# EAGLE board Breakouts (EAGLE 6.4)
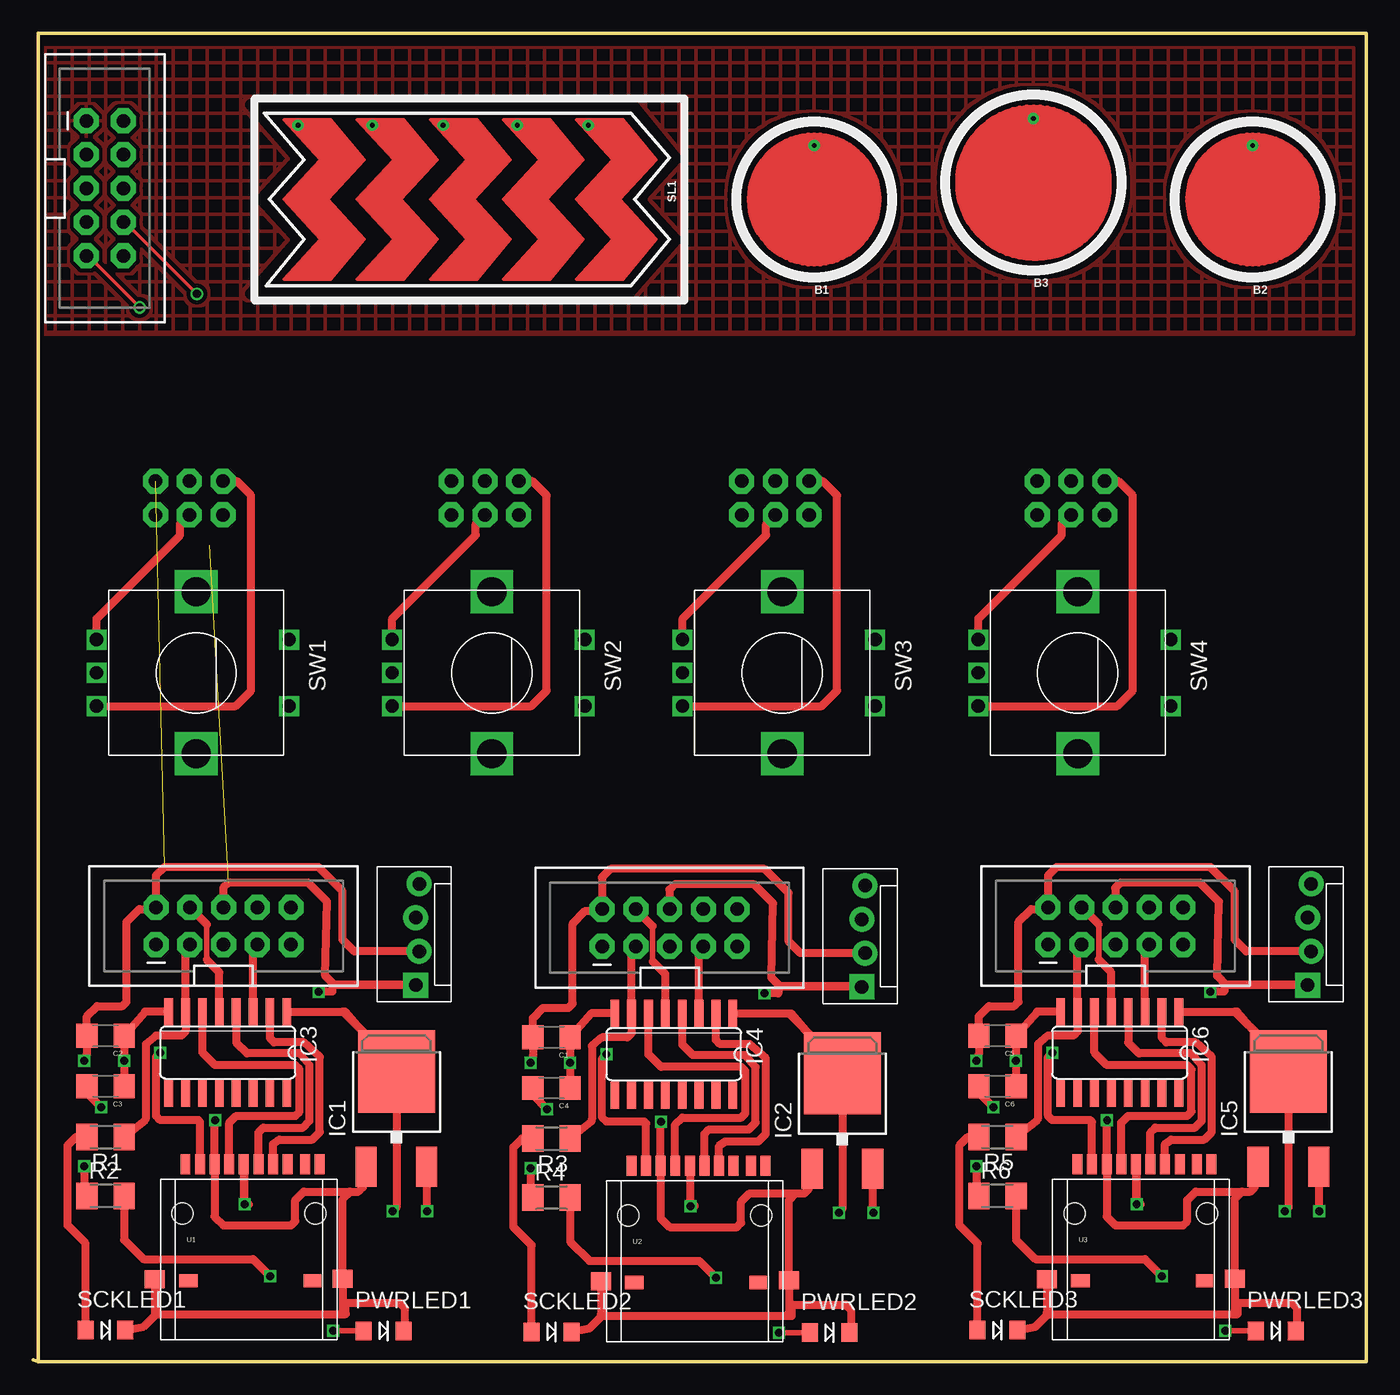
[diagram p0: board, top side]
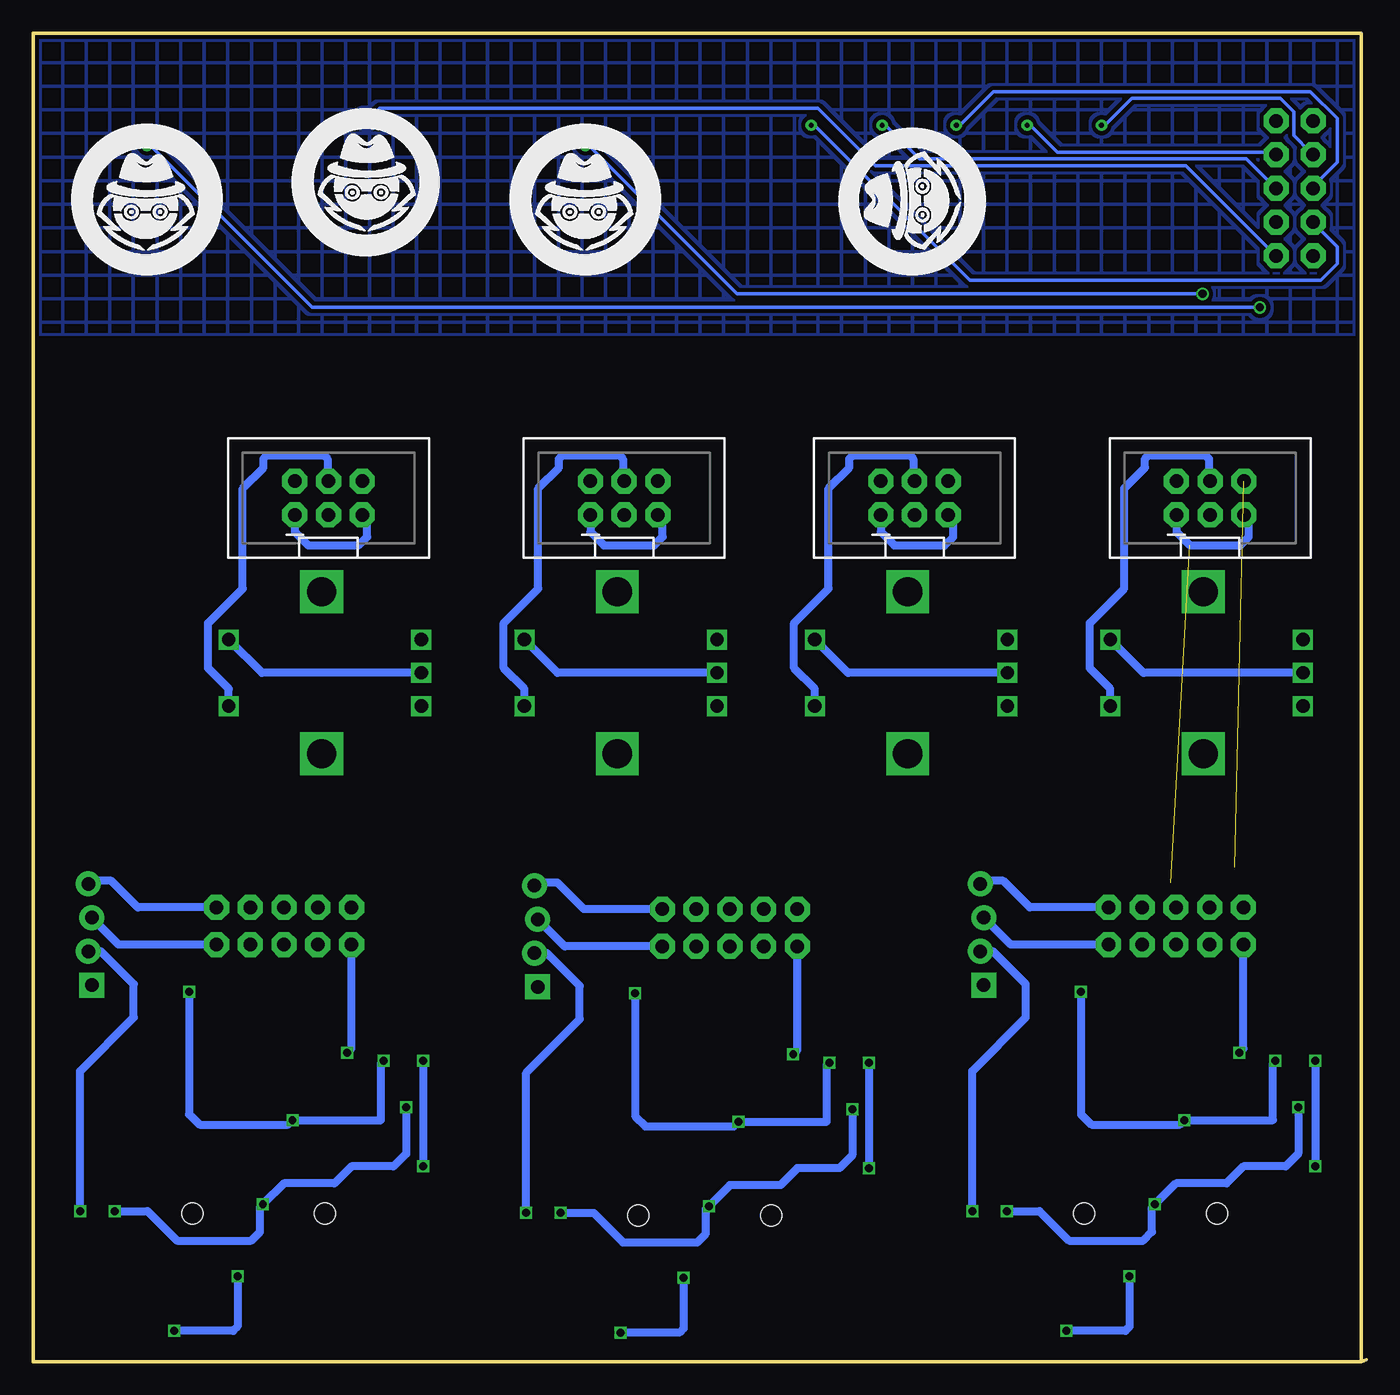
[diagram p1: board, bottom side, seen from below]

Size 100.39 x 100 mm. Coordinates in mm from the lower left corner, seen from the top.
Outline: 0,0.13 0.39,0
Outline: 0.39,0 100.39,0 100.39,100 0.39,100 0.39,0
Copper layers (1*16): Top 0.035mm / dielectric 1.5mm / Bottom 0.035mm
Design rules "dirt_cheap_dirty_boards.v1": minimum track width 5mil, minimum drill 12mil, track to track 5mil, track to pad 5mil, pad to pad 5mil, via to via 5mil, smd to smd 0mil, copper to edge 10mil, drill to drill 10mil, minimum pad ring 10mil, minimum via ring 6mil, stop-mask expansion 2mil, vias tented up to drill 25mil, thermal gap 10mil

## Footprints (pad centres in the part's own frame; a part is rotated, then mirrored left to right if it is on the bottom)
BUTTON_PASSIVE_10MM = drill 0.356: BUTTON 0,4.064
BUTTON_PASSIVE_12MM = drill 0.356: BUTTON 0,4.826
1206 = smd 1.6 x 1.8: 1 -1.4,0; 2 1.4,0
DPACK = smd 1.6 x 3: 1 -2.28,-4.8; 3 2.28,-4.8 | smd 5.8 x 6.2: 4 0,2.38
SO16 = smd 0.66 x 2.032: 1 -4.445,-3.073; 2 -3.175,-3.073; 3 -1.905,-3.073; 4 -0.635,-3.073; 5 0.635,-3.073; 6 1.905,-3.073; 7 3.175,-3.073; 8 4.445,-3.073; 9 4.445,3.073; 10 3.175,3.073; 11 1.905,3.073; 12 0.635,3.073; 13 -0.635,3.073; 14 -1.905,3.073; 15 -3.175,3.073; 16 -4.445,3.073
2X5-SHROUDED_LOCK = drill 1.016 pad 1.88 octagon: 1 -1.397,5.08; 2 1.397,5.08; 3 -1.397,2.54; 4 1.397,2.54; 5 -1.397,0; 6 1.397,0; 7 -1.397,-2.54; 8 1.397,-2.54; 9 -1.397,-5.08; 10 1.397,-5.08
2X3-SHROUDED = drill 1.016 pad 1.88 octagon: 1 -1.27,2.54; 2 1.27,2.54; 3 -1.27,0; 4 1.27,0; 5 -1.27,-2.54; 6 1.27,-2.54
MOLEX-1X4_LOCK = drill 1.016 pad 1.88 square: 1 0,0.127 | drill 1.016 pad 1.88: 2 2.54,-0.127; 3 5.08,0.127; 4 7.62,-0.127
LED-1206 = smd 1.2 x 1.4: A -1.5,0; C 1.5,0
M1206 = smd 1.6 x 2: 1 -1.4,0; 2 1.4,0
SLIDER_PASSIVE_5SEG_12MM = drill 0.356: SL1 -5.588,-13.462; SL2 -5.588,-7.874; SL3 -5.588,-2.54; SL4 -5.588,3.048; SL5 -5.588,8.382
ALPS_EC12E_SW = drill 1 square: A -2.5,-7.5; B 2.5,-7.5; C 0,-7.5; D -2.5,7; E 2.5,7 | drill 2.2 square: GND1 -6.1,0; GND2 6.1,0
USD-SOCKET-PP = smd 0.75 x 1.5: 1 2.925,1.125; 2 1.825,1.125; 3 0.725,1.125; 4 -0.375,1.125; 5 -1.475,1.125; 6 -2.575,1.125; 7 -3.675,1.125; 8 -4.775,1.125; CD1 5.325,1.125; CD2 4.225,1.125 | smd 1.4 x 1: CDNC1 -4.55,-7.65 | smd 1.3 x 1: CDNC2 4.775,-7.65 | smd 1.5 x 1.35: GND1 -7.075,-7.55; GND2 7.075,-7.5 | hole 1.6: -5,-2.6; 5,-2.6

## Placement (x,y rotation side)
B1  [BUTTON_PASSIVE_10MM]  58.81,87.48 0 top
B2  [BUTTON_PASSIVE_10MM]  91.83,87.48 0 top
B3  [BUTTON_PASSIVE_12MM]  75.32,88.75 0 top
C1  0.1u  [1206]  39.03,24.41 180 top
C2  0.1u  [1206]  5.45,24.54 180 top
C3  0.1u  [1206]  5.45,20.73 180 top
C4  0.1u  [1206]  39.03,20.6 180 top
C5  0.1u  [1206]  72.62,24.54 180 top
C6  0.1u  [1206]  72.62,20.73 180 top
IC1  LD117ADT-TR  [DPACK]  27.35,19.46 0 top
IC2  LD117ADT-TR  [DPACK]  60.94,19.33 0 top
IC3  4050D  [SO16]  14.65,23.27 180 top
IC4  4050D  [SO16]  48.24,23.14 180 top
IC5  LD117ADT-TR  [DPACK]  94.52,19.46 0 top
IC6  4050D  [SO16]  81.82,23.27 180 top
JP1  M05X2SHD_LOCK  [2X5-SHROUDED_LOCK]  14.34,32.79 90 top
JP2  [2X3-SHROUDED]  11.76,65 90 bottom
JP3  [MOLEX-1X4_LOCK]  28.94,28.35 90 top
JP4  M05X2SHD_LOCK  [2X5-SHROUDED_LOCK]  47.92,32.66 90 top
JP5  [MOLEX-1X4_LOCK]  62.53,28.22 90 top
JP6  M05X2SHD_LOCK  [2X5-SHROUDED_LOCK]  81.51,32.79 90 top
JP7  [MOLEX-1X4_LOCK]  96.11,28.35 90 top
JP8  [2X3-SHROUDED]  34.02,65 90 bottom
JP9  [2X3-SHROUDED]  55.89,65 90 bottom
JP10  [2X3-SHROUDED]  78.15,65 90 bottom
JP11  M05X2SHD_LOCK  [2X5-SHROUDED_LOCK]  5.39,88.32 0 top
PWRLED1  [LED-1206]  26.39,2.32 0 top
PWRLED2  [LED-1206]  59.98,2.19 0 top
PWRLED3  [LED-1206]  93.56,2.32 0 top
R1  [M1206]  5.45,16.92 180 top
R2  [M1206]  5.45,12.47 0 top
R3  [M1206]  39.03,16.79 180 top
R4  [M1206]  39.03,12.34 0 top
R5  [M1206]  72.62,16.92 180 top
R6  [M1206]  72.62,12.47 0 top
SCKLED1  [LED-1206]  5.45,2.37 0 top
SCKLED2  [LED-1206]  39.03,2.24 0 top
SCKLED3  [LED-1206]  72.62,2.37 0 top
SL1  SLIDER_PASSIVE_5SEG  [SLIDER_PASSIVE_5SEG_12MM]  33.41,87.48 270 top
SW1  EC12E_SW  [ALPS_EC12E_SW]  12.27,51.85 270 top
SW2  EC12E_SW  [ALPS_EC12E_SW]  34.53,51.85 270 top
SW3  EC12E_SW  [ALPS_EC12E_SW]  56.4,51.85 270 top
SW4  EC12E_SW  [ALPS_EC12E_SW]  78.66,51.85 270 top
U1  USD-SOCKETUSD  [USD-SOCKET-PP]  16.24,13.74 0 top
U2  USD-SOCKETUSD  [USD-SOCKET-PP]  49.83,13.61 0 top
U3  USD-SOCKETUSD  [USD-SOCKET-PP]  83.41,13.74 0 top

## Library data of the parts
B1-B3 SL1 = PatternAgents-TouchWidgets
C1-C6 = SparkFun-Passives
IC1 IC2 IC5 = v-reg
IC3 IC4 IC6 = 40xx
JP1 JP3-JP7 JP11 = SparkFun-Connectors
JP2 JP8-JP10 = SparkFun-Connectors; PROD_ID: CONN-10681
PWRLED1-PWRLED3 SCKLED1-SCKLED3 = LilyPad-Wearables
R1-R6 = adafruit
SW1-SW4 = switch-alps; MPN: EC12E2424407; OC_FARNELL: 1520813; OC_NEWARK: 74M1068
U1-U3 = SparkFun-Connectors_PETERMICROSDEBAY

## Nets
3V3SD: C3.2 IC1.4 IC3.1 U1.4
3V3SD1: C4.2 IC2.4 IC4.1 U2.4
3V3SD2: C6.2 IC5.4 IC6.1 U3.4
B1: B1.BUTTON JP11.8
B2: B2.BUTTON JP11.9
B3: B3.BUTTON JP11.10
CS: IC3.2 U1.2
CS1: IC4.2 U2.2
CS2: IC6.2 U3.2
DI: IC3.4 U1.3
DI1: IC4.4 U2.3
DI2: IC6.4 U3.3
ENCA: JP2.2 SW1.B
ENCA1: JP8.2 SW2.B
ENCA2: JP9.2 SW3.B
ENCA3: JP10.2 SW4.B
ENCB: JP2.3 SW1.A
ENCB1: JP8.3 SW2.A
ENCB2: JP9.3 SW3.A
ENCB3: JP10.3 SW4.A
ENCC: JP2.4 SW1.E
ENCC1: JP8.4 SW2.E
ENCC2: JP9.4 SW3.E
ENCC3: JP10.4 SW4.E
GND: C2.1 C3.1 IC1.1 IC3.8 JP1.6 JP2.1 JP2.5 JP3.1 PWRLED1.C SCKLED1.C U1.6 U1.GND1 U1.GND2
GND1: C1.1 C4.1 IC2.1 IC4.8 JP4.6 JP5.1 PWRLED2.C SCKLED2.C U2.6 U2.GND1 U2.GND2
GND2: C5.1 C6.1 IC5.1 IC6.8 JP6.6 JP7.1 PWRLED3.C SCKLED3.C U3.6 U3.GND1 U3.GND2
GND3: JP8.1 JP8.5
GND4: JP9.1 JP9.5
GND5: JP10.1 JP10.5
GND6: JP11.1
MCURESET: JP1.5
MCURESET1: JP4.5
MCURESET2: JP6.5
MISO: JP1.1 U1.7
MISO1: JP4.1 U2.7
MISO2: JP6.1 U3.7
MOSI: IC3.5 JP1.4
MOSI1: IC4.5 JP4.4
MOSI2: IC6.5 JP6.4
N$1: JP1.8
N$2: SW1.C SW1.D
N$3: R1.2 SCKLED1.A
N$4: PWRLED1.A R2.2
N$5: JP4.8
N$6: R3.2 SCKLED2.A
N$7: PWRLED2.A R4.2
N$8: JP6.8
N$9: R5.2 SCKLED3.A
N$10: PWRLED3.A R6.2
N$11: SW2.C SW2.D
N$12: SW3.C SW3.D
N$13: SW4.C SW4.D
SC: IC3.6 U1.5
SC1: IC4.6 U2.5
SC2: IC6.6 U3.5
SCK: IC3.7 JP1.3 R1.1
SCK1: IC4.7 JP4.3 R3.1
SCK2: IC6.7 JP6.3 R5.1
SCL: JP1.10 JP3.4
SCL1: JP4.10 JP5.4
SCL2: JP6.10 JP7.4
SDA: JP1.9 JP3.3
SDA1: JP4.9 JP5.3
SDA2: JP6.9 JP7.3
SDS: IC3.3 JP1.7
SDS1: IC4.3 JP4.7
SDS2: IC6.3 JP6.7
SL1: JP11.3 SL1.SL1
SL2: JP11.4 SL1.SL2
SL3: JP11.5 SL1.SL3
SL4: JP11.6 SL1.SL4
SL5: JP11.7 SL1.SL5
VCC: C2.2 IC1.3 JP1.2 JP2.6 JP3.2 R2.1
VCC1: C1.2 IC2.3 JP4.2 JP5.2 R4.1
VCC2: C5.2 IC5.3 JP6.2 JP7.2 R6.1
VCC3: JP8.6
VCC4: JP9.6
VCC5: JP10.6
VCC6: JP11.2

## Tracks (layer width: path | path; a pad name or v marks a point on that pad's centre or on a via)
3V3SD  (via drill 0.6)
  Top 0.61: 23.33,26.34 23.48,26.34 IC1.4 | C3.2 4.05,20.22 v5.13,19.14 | v15.92,11.84 15.92,14.81 U1.4 15.87,12.21 16.24,11.84 | IC3.1 23.33,26.34 | 23.33,26.34 25.45,24.22 24.81,23.58 27.35,21.04 27.35,11.6 v27.08,11.32
  Bottom 0.61: v5.13,19.14 5.13,15.65 6.08,14.69 9.26,14.69 10.53,13.42 14.34,13.42 v15.92,11.84 16.14,11.62 16.14,9.76 16.79,9.11 22.39,9.11 24.6,11.32 v27.08,11.32
3V3SD1  (via drill 0.6)
  Top 0.61: 56.91,26.21 57.07,26.21 IC2.4 | C4.2 37.63,20.09 v38.71,19.01 | v49.51,11.71 49.51,14.68 U2.4 49.45,12.08 49.83,11.71 | IC4.1 56.91,26.21 | 56.91,26.21 59.03,24.09 58.4,23.45 60.94,20.91 60.94,11.47 v60.66,11.2
  Bottom 0.61: v38.71,19.01 38.71,15.52 39.67,14.56 42.84,14.56 44.11,13.29 47.92,13.29 v49.51,11.71 49.73,11.49 49.73,9.63 50.38,8.98 55.98,8.98 58.19,11.2 v60.66,11.2
3V3SD2  (via drill 0.6)
  Top 0.61: 90.5,26.34 90.65,26.34 IC5.4 | C6.2 71.22,20.22 v72.3,19.14 | v83.09,11.84 83.09,14.81 U3.4 83.04,12.21 83.41,11.84 | IC6.1 90.5,26.34 | 90.5,26.34 92.62,24.22 91.98,23.58 94.52,21.04 94.52,11.6 v94.25,11.32
  Bottom 0.61: v72.3,19.14 72.3,15.65 73.25,14.69 76.43,14.69 77.7,13.42 81.51,13.42 v83.09,11.84 83.31,11.62 83.31,9.76 83.96,9.11 89.56,9.11 91.77,11.32 v94.25,11.32
B1  (via drill 0.61)
  Top 0.254: v12.33,80.37 6.99,85.71 JP11.8
  Bottom 0.254: v12.33,80.37 47.38,80.37 58.56,91.55 B1.BUTTON
B2  (via drill 0.61)
  Top 0.254: v8.01,79.36 4.2,83.17 JP11.9
  Bottom 0.254: v8.01,79.36 79.38,79.36 91.58,91.55 B2.BUTTON
B3
  Bottom 0.254: B3.BUTTON 75.07,93.58 74.3,94.34 41.28,94.34 36.97,90.02 13.6,90.02 6.99,83.42 JP11.10
CS
  Top 0.61: U1.2 18.07,16.37 18.54,16.71 21.02,16.71 21.58,17.27 21.58,22.95 20.37,24.03 18.15,24.03 17.83,24.35 IC3.2
CS1
  Top 0.61: U2.2 51.65,16.24 52.12,16.58 54.6,16.58 55.17,17.14 55.17,22.82 53.95,23.9 51.73,23.9 51.41,24.22 IC4.2
CS2
  Top 0.61: U3.2 85.24,16.37 85.71,16.71 88.19,16.71 88.75,17.27 88.75,22.95 87.54,24.03 85.32,24.03 85,24.35 IC6.2
DI
  Top 0.61: U1.3 16.97,17.25 17.32,17.61 20.31,17.61 20.82,18.11 20.82,22.31 20.05,23.21 16.09,23.21 15.29,24.02 IC3.4
DI1
  Top 0.61: U2.3 50.55,17.12 50.91,17.48 53.9,17.48 54.4,17.98 54.4,22.18 53.64,23.08 49.68,23.08 48.87,23.89 IC4.4
DI2
  Top 0.61: U3.3 84.14,17.25 84.49,17.61 87.48,17.61 87.99,18.11 87.99,22.31 87.22,23.21 83.26,23.21 82.46,24.02 IC6.4
ENCA
  Top 0.61: SW1.B 15.25,49.35 16.4,50.51 16.4,65.22 15.36,66.26 14.31,66.26 JP2.2
ENCA1
  Top 0.61: SW2.B 37.5,49.35 38.66,50.51 38.66,65.22 37.62,66.26 36.57,66.26 JP8.2
ENCA2
  Top 0.61: SW3.B 59.37,49.35 60.53,50.51 60.53,65.22 59.49,66.26 58.44,66.26 JP9.2
ENCA3
  Top 0.61: SW4.B 81.63,49.35 82.79,50.51 82.79,65.22 81.75,66.26 80.7,66.26 JP10.2
ENCB
  Top 0.61: SW1.A 4.77,55.93 11.06,62.22 11.06,63.04 JP2.3
ENCB1
  Top 0.61: SW2.A 27.03,55.93 33.32,62.22 33.32,63.04 JP8.3
ENCB2
  Top 0.61: SW3.A 48.9,55.93 55.19,62.22 55.19,63.04 JP9.3
ENCB3
  Top 0.61: SW4.A 71.16,55.93 77.45,62.22 77.45,63.04 JP10.3
ENCC
  Bottom 0.61: SW1.E 19.27,50.65 20.83,52.2 20.83,55.59 18.22,58.19 18.22,65.74 16.66,67.3 16.66,67.95 16.4,68.21 12.11,68.21 11.85,67.95 11.85,66.36 JP2.4
ENCC1
  Bottom 0.61: SW2.E 41.53,50.65 43.09,52.2 43.09,55.59 40.48,58.19 40.48,65.74 38.92,67.3 38.92,67.95 38.66,68.21 34.37,68.21 34.11,67.95 34.11,66.36 JP8.4
ENCC2
  Bottom 0.61: SW3.E 63.4,50.65 64.96,52.2 64.96,55.59 62.35,58.19 62.35,65.74 60.79,67.3 60.79,67.95 60.53,68.21 56.24,68.21 55.98,67.95 55.98,66.36 JP9.4
ENCC3
  Bottom 0.61: SW4.E 85.66,50.65 87.22,52.2 87.22,55.59 84.61,58.19 84.61,65.74 83.05,67.3 83.05,67.95 82.79,68.21 78.5,68.21 78.24,67.95 78.24,66.36 JP10.4
GND  (via drill 0.6)  (1 unrouted)
  Top 0.61: IC3.8 8.43,26.34 C2.1 v6.85,22.63 C3.1 | 23.86,12.79 20.37,12.79 19.73,12.15 19.73,10.57 19.42,10.25 14.34,10.25 13.67,10.92 U1.6 13.67,18.15 v13.7,18.19 | 23.86,12.79 24.5,12.79 24.81,13.11 24.81,14.4 IC1.1 | SCKLED1.C 8.3,2.63 9.26,3.58 | 9.26,3.58 9.26,6.1 U1.GND1 9.17,3.67 9.26,3.58 | 9.26,3.58 23.54,3.58 | 23.54,3.58 23.32,3.81 U1.GND2 23.32,12.24 23.86,12.79 | JP1.6 14.32,34.2 14.32,35.67 14.71,36.06 20.7,36.06 22.13,34.63 22,29.03 22.68,28.35 JP3.1 28.81,28.42 27.34,28.38 22.52,28.38 22.52,27.86 v21.48,27.86 | 23.54,3.58 23.54,4.41 23.56,4.43 27.6,4.43 27.99,4.04 27.99,2.41 PWRLED1.C
  Bottom 0.61: v6.85,22.63 7.03,22.44 7.03,18.19 v13.7,18.19 14.05,17.83 20.7,17.83 21.48,18.61 v21.48,27.86 | JP2.1 14.3,62.46 13.28,61.44 9.5,61.44 8.85,62.09 8.85,63.37 JP2.5
GND1  (via drill 0.6)
  Top 0.61: IC4.8 42.02,26.21 C1.1 v40.43,22.5 C4.1 | 57.45,12.66 53.95,12.66 53.32,12.02 53.32,10.44 53,10.12 47.92,10.12 47.25,10.79 U2.6 47.25,18.02 v47.29,18.06 | 57.45,12.66 58.08,12.66 58.4,12.98 58.4,14.27 IC2.1 | SCKLED2.C 41.89,2.5 42.84,3.45 | 42.84,3.45 42.84,5.97 U2.GND1 42.75,3.54 42.84,3.45 | 42.84,3.45 57.13,3.45 | 57.13,3.45 56.9,3.68 U2.GND2 56.9,12.11 57.45,12.66 | JP4.6 47.9,34.07 47.9,35.54 48.29,35.93 54.28,35.93 55.71,34.5 55.58,28.9 56.27,28.22 JP5.1 62.4,28.29 60.92,28.25 56.11,28.25 56.11,27.73 v55.06,27.73 | 57.13,3.45 57.13,4.28 57.15,4.3 61.18,4.3 61.57,3.9 61.57,2.28 PWRLED2.C
  Bottom 0.61: v40.43,22.5 40.62,22.31 40.62,18.06 v47.29,18.06 47.64,17.7 54.28,17.7 55.06,18.48 v55.06,27.73
GND2  (via drill 0.6)
  Top 0.61: IC6.8 75.6,26.34 C5.1 v74.02,22.63 C6.1 | 91.03,12.79 87.54,12.79 86.9,12.15 86.9,10.57 86.59,10.25 81.51,10.25 80.84,10.92 U3.6 80.84,18.15 v80.87,18.19 | 91.03,12.79 91.67,12.79 91.98,13.11 91.98,14.4 IC5.1 | SCKLED3.C 75.47,2.63 76.43,3.58 | 76.43,3.58 76.43,6.1 U3.GND1 76.34,3.67 76.43,3.58 | 76.43,3.58 90.71,3.58 | 90.71,3.58 90.49,3.81 U3.GND2 90.49,12.24 91.03,12.79 | JP6.6 81.49,34.2 81.49,35.67 81.88,36.06 87.87,36.06 89.3,34.63 89.17,29.03 89.85,28.35 JP7.1 95.98,28.42 94.51,28.38 89.69,28.38 89.69,27.86 v88.65,27.86 | 90.71,3.58 90.71,4.41 90.73,4.43 94.77,4.43 95.16,4.04 95.16,2.41 PWRLED3.C
  Bottom 0.61: v74.02,22.63 74.2,22.44 74.2,18.19 v80.87,18.19 81.22,17.83 87.87,17.83 88.65,18.61 v88.65,27.86
GND3
  Bottom 0.61: JP8.1 36.56,62.46 35.54,61.44 31.76,61.44 31.11,62.09 31.11,63.37 JP8.5
GND4
  Bottom 0.61: JP9.1 58.43,62.46 57.41,61.44 53.63,61.44 52.98,62.09 52.98,63.37 JP9.5
GND5
  Bottom 0.61: JP10.1 80.69,62.46 79.67,61.44 75.89,61.44 75.24,62.09 75.24,63.37 JP10.5
GND6
  pour Top (isolate 0.305, hatched): 0.39,98.91 99.45,98.91 99.45,77.32 0.39,77.32
MISO  (via drill 0.6)
  Top 0.61: U1.7 12.57,18.05 12.43,18.19 9.57,18.19 9.26,18.5 9.26,22.95 v9.57,23.27
  Bottom 0.61: v9.57,23.27 9.26,23.58 JP1.1
MISO1  (via drill 0.6)
  Top 0.61: U2.7 46.15,17.92 46.02,18.06 43.16,18.06 42.84,18.37 42.84,22.82 v43.16,23.14
  Bottom 0.61: v43.16,23.14 42.84,23.45 JP4.1
MISO2  (via drill 0.6)
  Top 0.61: U3.7 79.74,18.05 79.6,18.19 76.74,18.19 76.43,18.5 76.43,22.95 v76.74,23.27
  Bottom 0.61: v76.74,23.27 76.43,23.58 JP6.1
MOSI
  Top 0.406: 13.07,30.25 13.07,32.92
  Top 0.61: IC3.5 14.02,29.3 13.07,30.25 | 13.07,32.92 JP1.4
MOSI1
  Top 0.406: 46.65,30.12 46.65,32.79
  Top 0.61: IC4.5 47.6,29.17 46.65,30.12 | 46.65,32.79 JP4.4
MOSI2
  Top 0.406: 80.24,30.25 80.24,32.92
  Top 0.61: IC6.5 81.19,29.3 80.24,30.25 | 80.24,32.92 JP6.4
N$2
  Bottom 0.61: SW1.C 16.77,51.85 SW1.D
N$3
  Top 0.61: SCKLED1.A 3.95,8.89 2.59,10.25 2.59,16.28 3.22,16.92 R1.2
N$4  (via drill 0.6)
  Top 0.406: v22.59,2.31 PWRLED1.A
  Top 0.61: R2.2 6.85,9.17 8.3,7.71 16.56,7.71 v17.83,6.44
  Bottom 0.61: v17.83,6.44 17.83,2.63 18.15,2.31 v22.59,2.31
N$6
  Top 0.61: SCKLED2.A 37.53,8.76 36.17,10.12 36.17,16.15 36.81,16.79 R3.2
N$7  (via drill 0.6)
  Top 0.406: v56.18,2.18 PWRLED2.A
  Top 0.61: R4.2 40.43,9.04 41.89,7.58 50.14,7.58 v51.41,6.31
  Bottom 0.61: v51.41,6.31 51.41,2.5 51.73,2.18 v56.18,2.18
N$9
  Top 0.61: SCKLED3.A 71.12,8.89 69.76,10.25 69.76,16.28 70.39,16.92 R5.2
N$10  (via drill 0.6)
  Top 0.406: v89.76,2.31 PWRLED3.A
  Top 0.61: R6.2 74.02,9.17 75.47,7.71 83.73,7.71 v85,6.44
  Bottom 0.61: v85,6.44 85,2.63 85.32,2.31 v89.76,2.31
N$11
  Bottom 0.61: SW2.C 39.03,51.85 SW2.D
N$12
  Bottom 0.61: SW3.C 60.9,51.85 SW3.D
N$13
  Bottom 0.61: SW4.C 83.16,51.85 SW4.D
N$14
  pour Bottom (isolate 0.305, hatched): 0.39,100.18 100.72,100.18 100.72,77.32 0.39,77.32
SC
  Top 0.61: U1.5 14.77,17.98 15.29,18.5 19.73,18.5 20.05,18.82 20.05,22 19.73,22.31 13.7,22.31 12.75,23.27 IC3.6
SC1
  Top 0.61: U2.5 48.35,17.85 48.87,18.37 53.32,18.37 53.64,18.69 53.64,21.87 53.32,22.18 47.29,22.18 46.33,23.14 IC4.6
SC2
  Top 0.61: U3.5 81.94,17.98 82.46,18.5 86.9,18.5 87.22,18.82 87.22,22 86.9,22.31 80.87,22.31 79.92,23.27 IC6.6
SCK
  Top 0.61: JP1.3 11.48,31.08 IC3.7 11.48,24.85 11.16,24.54 9.26,24.54 8.49,23.9 8.49,18.37 8.43,18.19 R1.1
SCK1
  Top 0.61: JP4.3 45.06,30.95 IC4.7 45.06,24.72 44.75,24.41 42.84,24.41 42.08,23.77 42.08,18.24 42.02,18.06 R3.1
SCK2
  Top 0.61: JP6.3 78.65,31.08 IC6.7 78.65,24.85 78.33,24.54 76.43,24.54 75.66,23.9 75.66,18.37 75.6,18.19 R5.1
SCL
  Bottom 0.61: JP1.10 25.34,34.19 27.34,36.19 28.84,36.19 JP3.4
SCL1
  Bottom 0.61: JP4.10 58.92,34.06 60.92,36.06 62.43,36.06 JP5.4
SCL2
  Bottom 0.61: JP6.10 92.51,34.19 94.51,36.19 96.02,36.19 JP7.4
SDA
  Bottom 0.61: JP1.9 26.78,31.39 JP3.3
SDA1
  Bottom 0.61: JP4.9 60.37,31.26 JP5.3
SDA2
  Bottom 0.61: JP6.9 93.95,31.39 JP7.3
SDS
  Top 0.61: IC3.3 16.56,31.08 JP1.7
SDS1
  Top 0.61: IC4.3 50.14,30.95 JP4.7
SDS2
  Top 0.61: IC6.3 83.73,31.08 JP6.7
SL1
  Bottom 0.254: SL1.SL1 19.69,93.07 17.66,95.1 6.49,95.1 5.47,94.09 5.47,92.31 4.2,91.04 JP11.3
SL2
  Bottom 0.254: SL1.SL2 25.28,93.07 23.25,91.04 6.99,91.04 JP11.4
SL3
  Bottom 0.254: SL1.SL3 30.62,93.07 28.08,95.61 4.2,95.61 2.17,93.58 2.17,90.28 3.95,88.5 JP11.5
SL4
  Bottom 0.254: SL1.SL4 36.2,93.07 33.66,90.53 9.03,90.53 6.99,88.5 JP11.6
SL5
  Bottom 0.254: SL1.SL5 41.54,93.07 29.85,81.39 3.44,81.39 2.17,82.66 2.17,83.93 3.95,85.71 JP11.7
VCC  (via drill 0.6)  (1 unrouted)
  Top 0.61: v3.86,22.63 4.05,23.14 C2.2 4.05,25.99 4.81,26.76 6.72,26.76 7.03,27.08 7.03,33.11 7.99,34.06 9.13,34.06 JP1.2 9.24,34.2 9.24,36.58 9.89,37.23 21.48,37.23 23.3,35.41 23.3,31.76 24.18,30.89 JP3.2 | v3.86,14.69 3.86,12.66 R2.1 | IC1.3 29.63,11.37 v29.68,11.32
  Bottom 0.61: v3.86,22.63 v3.86,14.69 | v29.68,11.32 29.68,21.87 25.64,25.91 25.64,28.41 28.12,30.89 JP3.2
VCC1  (via drill 0.6)
  Top 0.61: v37.44,22.5 37.63,23.01 C1.2 37.63,25.86 38.4,26.63 40.3,26.63 40.62,26.95 40.62,32.98 41.57,33.93 42.71,33.93 JP4.2 42.83,34.07 42.83,36.45 43.48,37.1 55.06,37.1 56.89,35.28 56.89,31.63 57.76,30.76 JP5.2 | v37.44,14.56 37.44,12.53 R4.1 | IC2.3 63.22,11.24 v63.27,11.2
  Bottom 0.61: v37.44,22.5 v37.44,14.56 | v63.27,11.2 63.27,21.74 59.23,25.77 59.23,28.28 61.7,30.76 JP5.2
VCC2  (via drill 0.6)
  Top 0.61: v71.03,22.63 71.22,23.14 C5.2 71.22,25.99 71.98,26.76 73.89,26.76 74.2,27.08 74.2,33.11 75.16,34.06 76.3,34.06 JP6.2 76.41,34.2 76.41,36.58 77.06,37.23 88.65,37.23 90.47,35.41 90.47,31.76 91.35,30.89 JP7.2 | v71.03,14.69 71.03,12.66 R6.1 | IC5.3 96.8,11.37 v96.85,11.32
  Bottom 0.61: v71.03,22.63 v71.03,14.69 | v96.85,11.32 96.85,21.87 92.81,25.91 92.81,28.41 95.29,30.89 JP7.2

## Text on the board
OPENHWSILK: SELECT | SCL | SCL | SCL | SDA | SDA | SDA | VCC | VCC | VCC | CONTROLLER | CONTROLLER | CONTROLLER | GND | GND | GND | 104 | 104 | 104 | 104 | 104 | 104 | 1k | 1k | 1k | 1k | 1k | 1k | ACT | SD | + | PWR | ACT | SD | PWR | ACT | SD | + | PWR | + | + | + | + | OPENHARDWARE.CO.ZA | OPENHARDWARE.CO.ZA | OPENHARDWARE.CO.ZA